# Altium PCB charger.PcbDoc
Units mm, origin at the board's own origin, x right, y up, seen from the top; angles counter-clockwise.
Board outline 30.48 x 35.56 mm, 2 copper layers (Top Layer, Bottom Layer), stack 1.58 mm thick; 22 components, 11 nets, 63 pads, 28 vias.
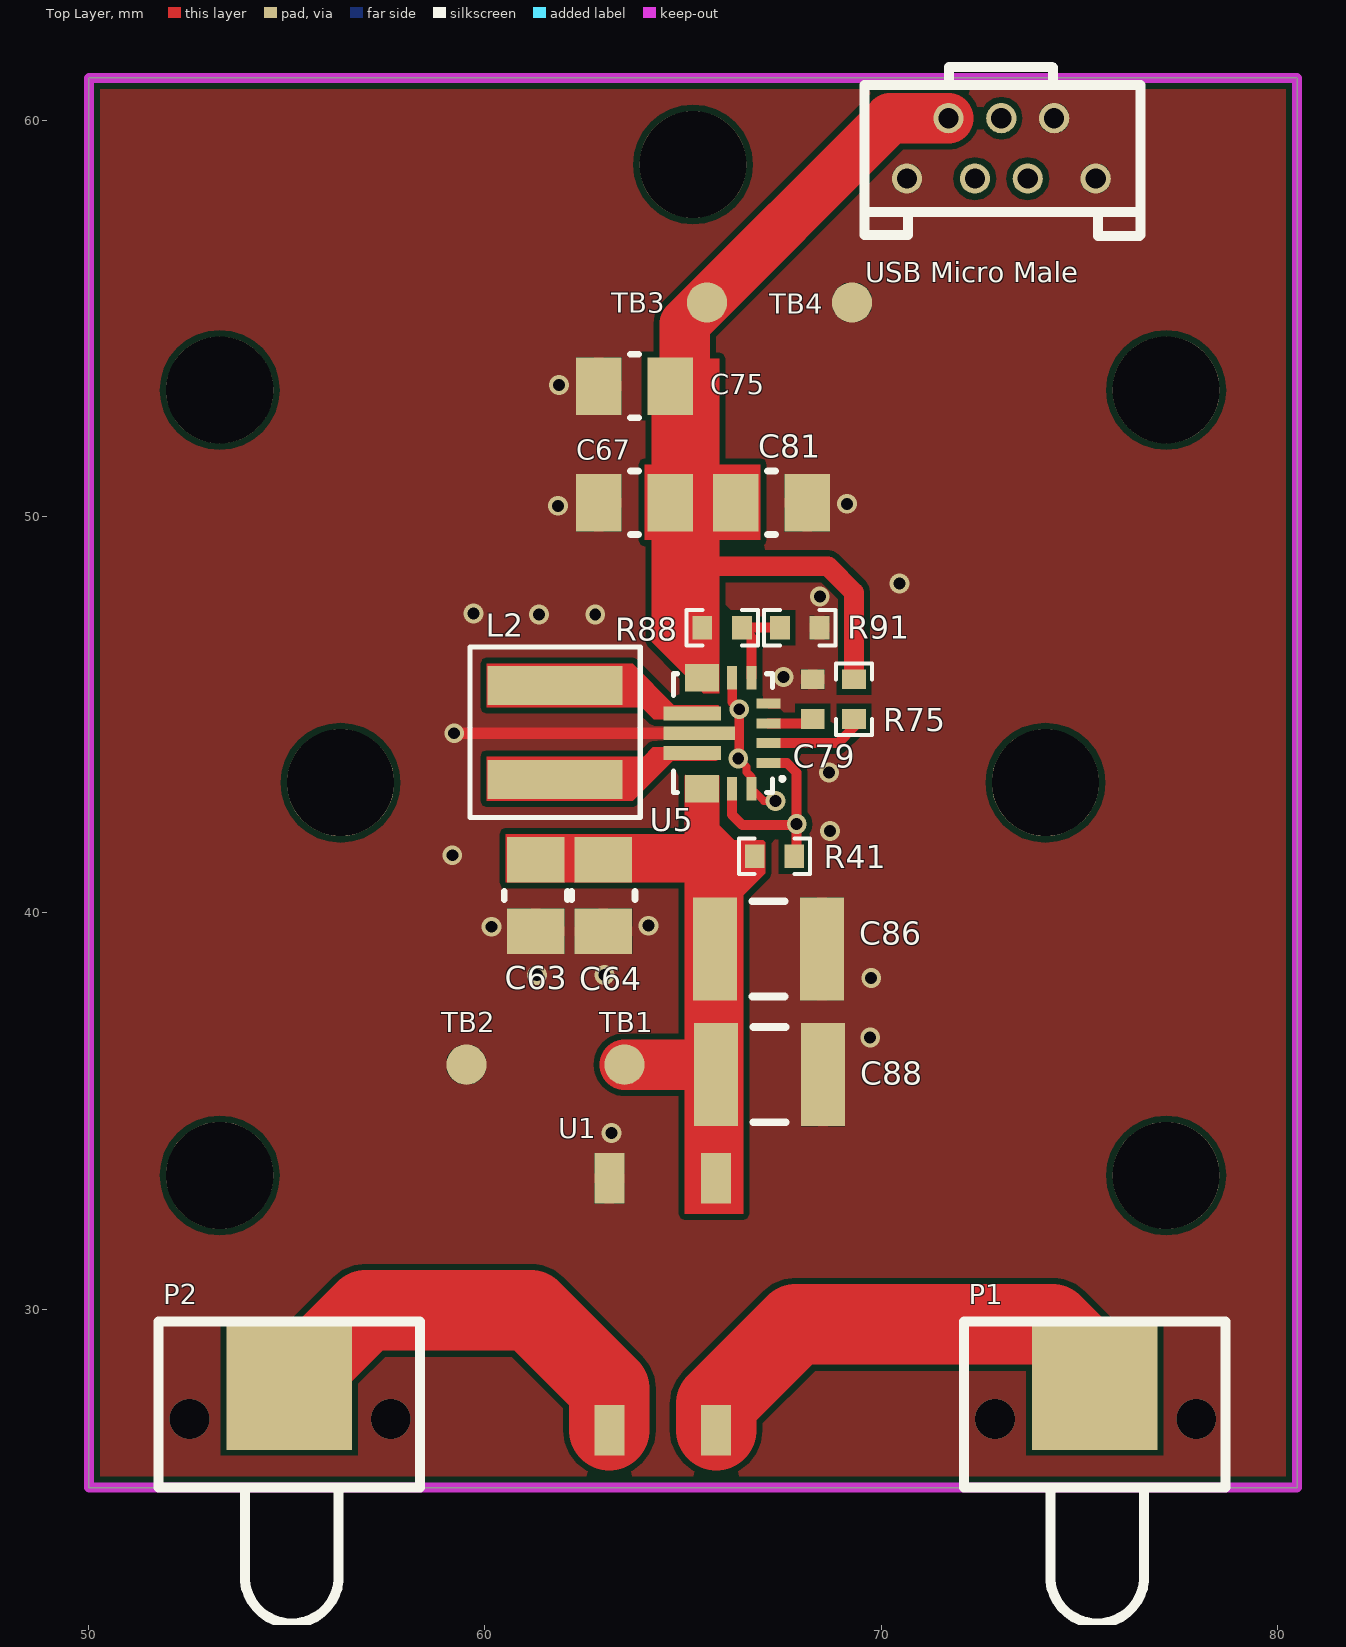
[diagram p0: Top Layer view]
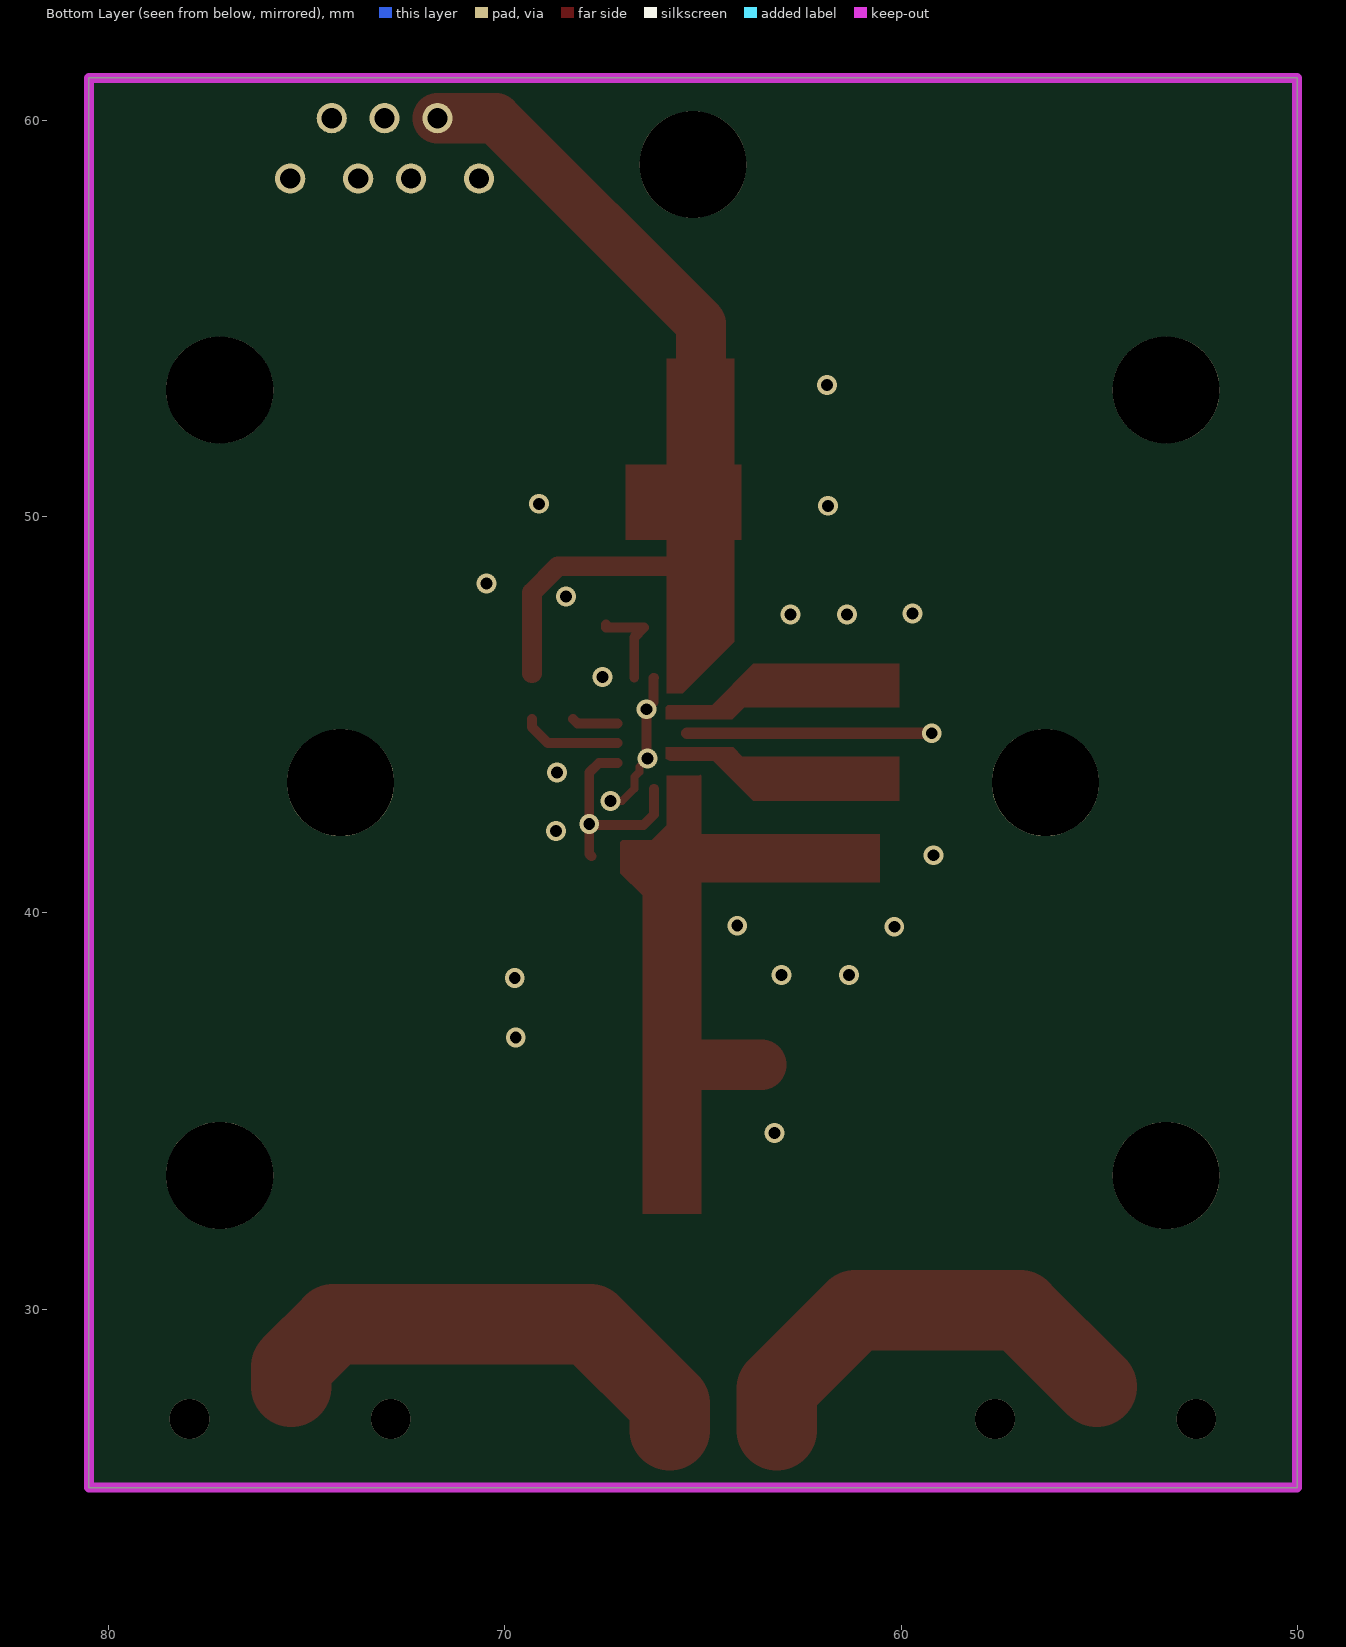
[diagram p1: Bottom Layer view, seen from below]
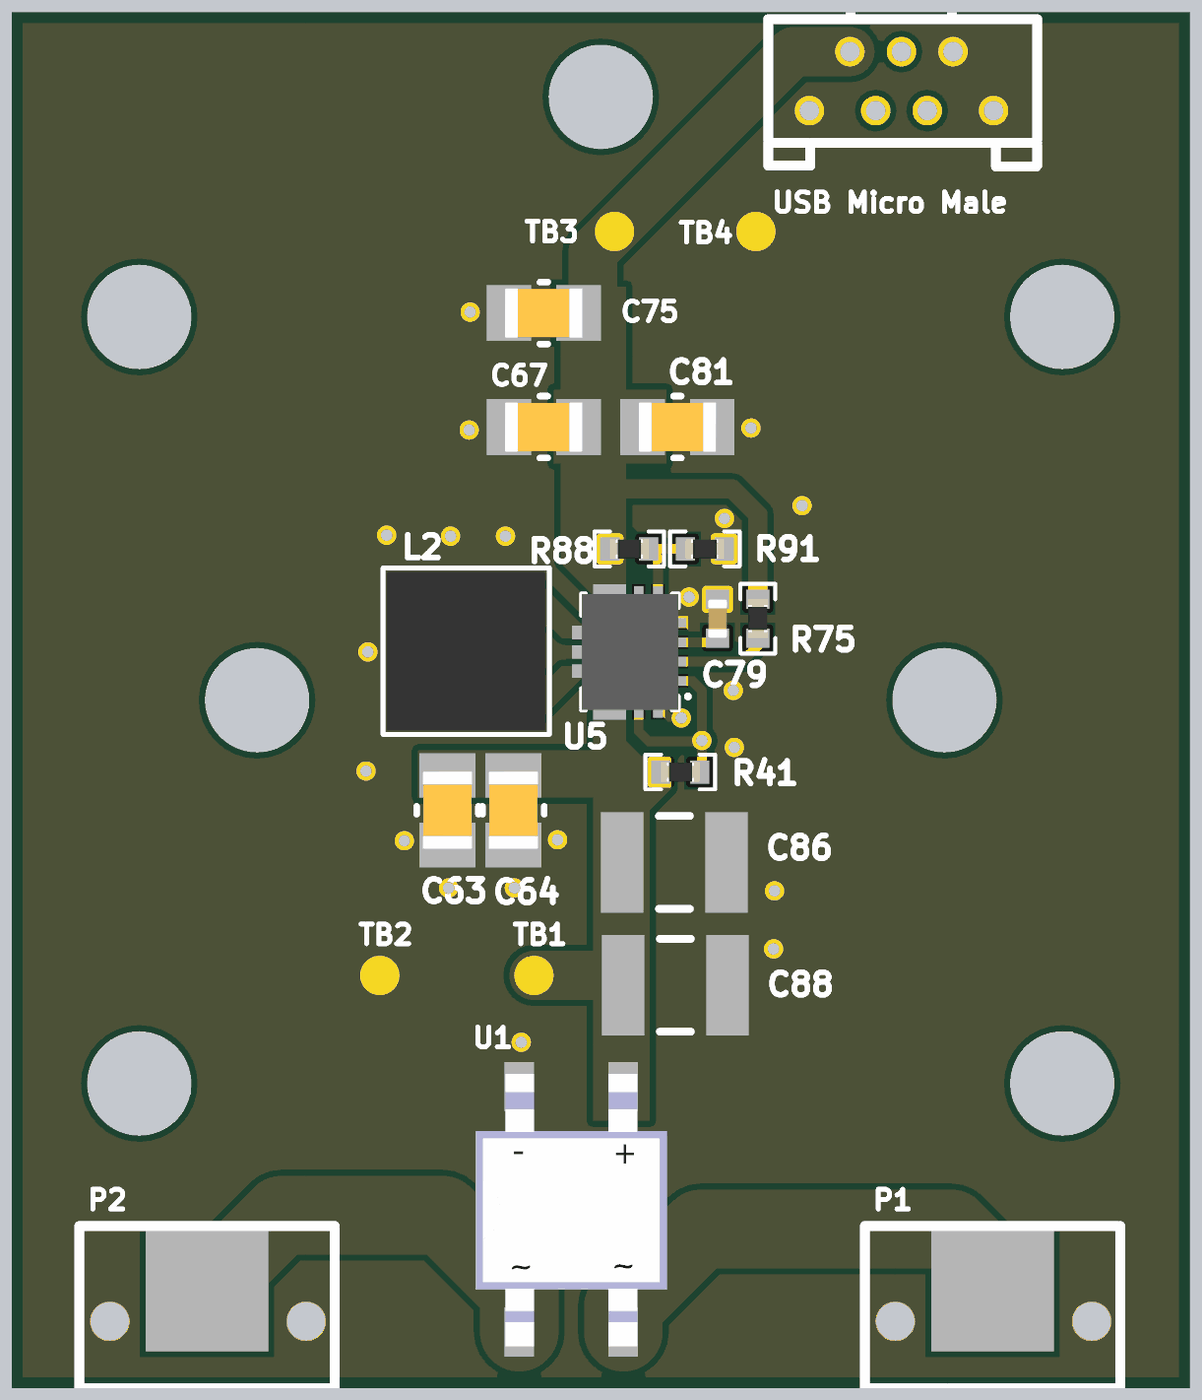
[diagram p2: 3D render of the assembled board from above, using the file's embedded part models]

## Layer stack, top to bottom
Top Solder: solder mask 0.01, Solder Resist, Dk 3.5
Top Layer: signal copper 0.036
Dielectric 1: core 1.508, FR-4, Dk 4.2
Bottom Layer: signal copper 0.036
Bottom Solder: solder mask 0.01, Solder Resist, Dk 3.5

## Board outline
50.013,25.502 50.013,61.062 80.493,61.062 80.493,25.502

## Design rules (kind name [scope] priority, off if disabled: settings)
Clearance Clearance_1 [All] p1: gap=0.152 ignorepadtopadclearanceinfootprint=TRUE
ComponentClearance [All] p1 off: gap=0.254 collisioncheckmode=3 verticalgap=0.254 showdistances=FALSE
HoleSize [All] p1: absolutevalues=TRUE maxlimit=5 minlimit=0.025 maxpercent=80.000 minpercent=20.000
MinimumSolderMaskSliver [All] p1 off: minsoldermaskwidth=0.254
PolygonConnect [isVia and innet(gnd)] p1: connectstyle=Direct reliefconductorwidth=0.254 reliefentries=4 polygonreliefangle="90 Angle" airgapwidth=0.254
RoutingVias [All] p1: holewidth=0.711 width=1.27 viastyle="Through Hole" minholewidth=0.711 minwidth=1.27 maxholewidth=0.711 maxwidth=1.27
SilkToSilkClearance [All] p1 off: silktosilkclearance=0.254
SilkToSolderMaskClearance [IsPad] p1 off: minsilkscreentomaskgap=0.254 clearancetoexposedcopper=TRUE
SolderMaskExpansion [IsVia] p1: expansion=0 soldermaskfromhole=TRUE
Width [All] p1: maxlimit=3 minlimit=0.1 preferedwidth=0.254 minimp=50.000000 maximp=50.000000 favimp=50.000000
25 further rules are at their usual default settings.

## Components (designator, comment, footprint, x,y, rotation, side; value= is the part's Value field where it differs from the comment)
C63 "Cap Semi" C0805 61.29,40.437 r90 top value=22uF
C64 "Cap Semi" C0805 62.992,40.437 r90 top value=22uF
C67 "Cap Semi" C0805 63.779,50.343 r0 top value=22uF
C75 "Cap Semi" C0805 63.779,53.289 r0 top value=22uF
C79 "Cap Semi" C0402 68.275,45.39 r90 top value=0.1uF
C81 "Cap Semi" C0805 67.234,50.343 r180 top value=10uF
C86 "Cap Semi" C1210 67.158,39.091 r180 top value=47uF
C88 "Cap Semi" C1210 67.183,35.916 r180 top value=47uF
L2 "Inductor" INDM4040X210 61.773,44.552 r90 top value=1.5uH
P1 "Plug" Pogo_RightAngle 75.387,28.042 r0 top
P2 "Plug" Pogo_RightAngle 55.067,28.042 r0 top
R41 "Res3" R0402 67.31,41.427 r180 top value=10k
R75 "Res3" R0402 69.317,45.39 r270 top value=100k
R88 "Res3" R0402 65.989,47.193 r180 top value=68k
R91 "Res3" R0402 67.945,47.193 r180 top value=13k
TB1 "TESTPOINT" TP-R40 63.525,36.17 r90 top
TB2 "TESTPOINT" TP-R40 59.538,36.17 r90 top
TB3 "TESTPOINT" TP-R40 65.608,55.397 r90 top
TB4 "TESTPOINT" TP-R40 69.266,55.397 r90 top
U1 "CDBHD2100-G" CDBHD2100-G 65.837,33.299 r270 top
U5 "TPS63070RNMR" QFN50P250X300X100-15N_TPS63070RNMR(Primary) 66.008,44.53 r180 top
"USB Micro Male" "USB MICRO SMD" "MicroUSB B Plug" 70.65,58.522 r0 top (schematic designator USB_SAMD21)

## Footprints (in the part's own frame and the unit in brackets; to place one, negate y for a bottom-side part, rotate by r counter-clockwise, add the part's x,y. Pads: shape width x height; smd on the part's side, far side on the other; paste and mask are expansions set on the pad)
C0402 [mm]
  rect 0.5x0.6 smd mask+0.1: 1(-0.5,0) 2(0.5,0)
  body extent -0.5,-0.25 0.5,0.25, height 0.47
C0805 [mm] "0805 / 1.45mm height"
  rect 1.15x1.45 smd: 1(-0.9,0) 2(0.9,0)
  silkscreen extent -0.1,-0.8 0.1,0.8, body extent -1.09,-0.64 1.09,0.64, height 1.26
C1210 [mm] "Chip Capacitor, Body 3.2x2.5mm, IPC High Density"
  rect 1.1x2.6 smd: 1(-1.35,0) 2(1.35,0)
  silkscreen extent -0.4,-1.2 0.4,1.2, body extent -1.7,-1.35 1.7,1.35, height 1.3
CDBHD2100-G [mil]
  rect 50x30 smd: 1(0,0) 2(0,-106) 3(250,-106) 4(250,0)
  body extent -13,-150 265,44, height 115
INDM4040X210 [mm]
  rect 0.98x3.4 smd: 1(-1.185,0) 2(1.185,0)
  silkscreen extent -2.15,-2.15 2.15,2.15, body extent -2.05,-2.05 2.05,2.05, height 2.1
"MicroUSB B Plug" [mil]
  round 30 hole 20: 1(41.25,60) 2(67.5,0) 3(93.75,60) 4(120,0) 5(146.25,60) 6(0,0) 6(187.5,0)
  silkscreen extent -42,-57 232,111
Pogo_RightAngle [mm]
  rect 3.175x3.175 smd: 1(0,0)
  silkscreen extent -3.3,-5.97 3.3,1.65
QFN50P250X300X100-15N_TPS63070RNMR(Primary) [mm]
  rect 0.6x0.25 smd: 1(-1.15,0.75) 2(-1.15,0.25) 3(-1.15,-0.25) 4(-1.15,-0.75)
  rect 0.25x0.6 smd: 5(-0.725,-1.4) 6(-0.225,-1.4) 14(-0.225,1.4) 15(-0.725,1.4)
  rect 0.85x0.7 smd: 7-8(0.525,-1.4) 12-13(0.525,1.4)
  rect 1.45x0.35 smd: 9(0.775,-0.5) 11(0.775,0.5)
  rect 1.8x0.35 smd: 10(0.6,0)
  silkscreen extent -1.55,-1.5 1.25,1.5, body extent -1.25,-1.5 1.25,1.5, height 1
R0402 [mm]
  rect 0.5x0.6 smd mask+0.1: 1(-0.5,0) 2(0.5,0)
  silkscreen extent -0.9,-0.45 0.9,0.45, body extent -0.5,-0.25 0.5,0.26, height 0.33
TP-R40 [mil]
  round 40 smd paste-40: 1(0,0)
  body extent -20,-20 20,20, height 10

## Part data
C63 C64 C67 C75: "Capacitor (Semiconductor SIM Model)", Capacitance=22uF, Case/Package=0805, Case Code (Metric)=2012, Dielectric=X5R, Manufacturer=Murata, Manufacturer Part Number=GRM21BR61E226ME44K, Max Operating Temperature=85āC, Min Operating Temperature=-55āC, Package Quantity=10000, Supplier Part Number 1=490-14661-1-ND, Tolerance=20%, Voltage Rating=25V, Case Code (Imperial)=0805, Composition=Ceramic, Height=1.25mm, Length=0.079inch, Mount="Surface Mount", Packaging="Tape and Reel", Pricing 1="1=0.49, 10=0.348, 100=0.2291, 500=0.1697, 1000=0.1443, 2500=0.1358, 5000=0.1273 (USD)", Stock 1=36449, Supplier 1=Digi-Key, Termination=SMD/SMT, Thickness=0.057inch, Voltage Rating (DC)=25V, Weight=0.000335oz, Width=1.25mm
C79: "Capacitor (Semiconductor SIM Model)", Capacitance=100nF, Case/Package=0402, Case Code (Metric)=1005, Dielectric=X7R, Manufacturer=Yageo, Manufacturer Part Number=CC0402JRX7R7BB104, Max Operating Temperature=125āC, Min Operating Temperature=-55āC, Package Quantity=10000, Supplier Part Number 1=311-1676-1-ND, Tolerance=5%, Voltage Rating=16V, Case Code (Imperial)=0402, ComponentLink1Description=http://www.mouser.com/ds/2/447/Yageo_UPY-GP_NP0_16V-to-50V_9-358835.pdf, ComponentLink1URL=http://www.mouser.com/ds/2/447/Yageo_UPY-GP_NP0_16V-to-50V_9-358835.pdf, ComponentLink2Description=http://www.yageo.com/documents/recent/UPY-GPHC_X7R_6.3V-to-50V_8.pdf, ComponentLink2URL=http://www.yageo.com/documents/recent/UPY-GPHC_X7R_6.3V-to-50V_8.pdf, Composition=Ceramic, Depth=0.5mm, Halogen Free="Halogen Free", Height=0.5mm, Lead Free="Lead Free", Length=1mm, Mount="Surface Mount", Packaging="Tape and Reel", Pricing 1="1=0.1, 10=0.057, 100=0.0256, 500=0.0183, 1000=0.0144, 2500=0.0131, 5000=0.012 (USD)", Radiation Hardening=No, Stock 1=874792, Supplier 1=Digi-Key, Thickness=0.022inch, Voltage Rating (DC)=16V, Width=0.02inch
C81: "Capacitor", Capacitance=10uF, Case/Package=0805, Case Code (Metric)=2012, Dielectric=X5R, Manufacturer=Samsung, Manufacturer Part Number=CL21A106KOQNNNG, Max Operating Temperature=85āC, Min Operating Temperature=-55āC, Package Quantity=3000, Supplier Part Number 1=1276-6455-1-ND, Tolerance=10%, Voltage=16V, Case Code (Imperial)=0805, ComponentLink1Description=http://www.samsungsem.com/kr/support/product-search/mlcc/CL21A106KOQNNNG.jsp, ComponentLink1URL=http://www.samsungsem.com/kr/support/product-search/mlcc/CL21A106KOQNNNG.jsp, ComponentLink2Description=https://produktinfo.conrad.com/datenblaetter/450000-474999/454932-da-01-en-VS_KONDENSATOR_0805.pdf, ComponentLink2URL=https://produktinfo.conrad.com/datenblaetter/450000-474999/454932-da-01-en-VS_KONDENSATOR_0805.pdf, Depth=1.25mm, Height=1.25mm, Length=2mm, Material=Ceramic, Mount="Surface Mount", Packaging="Tape and Reel", Pricing 1="1=0.14, 10=0.099, 100=0.0463, 500=0.0325, 1000=0.0269 (USD)", Stock 1=30000, Supplier 1=Digi-Key, Thickness=0.053inch, Voltage Rating=16V, Width=0.049inch
C86 C88: "Capacitor (Semiconductor SIM Model)", Capacitance=47uF, Case/Package=1210, Case Code (Metric)=3225, Dielectric=X6S, Manufacturer=Murata, Manufacturer Part Number=GRM32EC81C476KE15L, Max Operating Temperature=105āC, Min Operating Temperature=-55āC, Package Quantity=1000, Supplier Part Number 1=490-10531-1-ND, Tolerance=10%, Voltage=16V, Case Code (Imperial)=1210, ComponentLink1Description=http://www.farnell.com/datasheets/2048597.pdf?src-supplier=Element14, ComponentLink1URL=http://www.farnell.com/datasheets/2048597.pdf?src-supplier=Element14, Depth=2.5mm, Height=2.5mm, Lead Free="Lead Free", Length=3.2mm, Material=Ceramic, Mount="Surface Mount", Packaging="Tape and Reel", Pricing 1="1=0.78, 10=0.571, 100=0.3917, 500=0.3101 (USD)", REACH SVHC="No SVHC", Stock 1=39077, Supplier 1=Digi-Key, Termination=SMD/SMT, Thickness=0.106inch, Voltage Rating=16V, Voltage Rating (DC)=16V, Weight=0.00388oz, Width=2.5mm
L2: Case/Package=SMD/SMT, DC Resistance (DCR)=15.8mR, Inductance=1.5uh, Inductance Tolerance=20%, Manufacturer=Coilcraft, Manufacturer Part Number=XFL4020-152MEC, Max DC Current=9.1A, Max Operating Temperature=125āC, Min Operating Temperature=-40āC, Saturation Current=4.1A, Self Resonant Frequency=59MHz, Supplier Part Number 1=994-XFL4020-152MEC, Test Frequency=100kHz, ComponentLink1Description=http://www.mouser.com/ds/2/597/xfl4020-270756.pdf, ComponentLink1URL=http://www.mouser.com/ds/2/597/xfl4020-270756.pdf, ComponentLink2Description=http://www.farnell.com/datasheets/1682010.pdf, ComponentLink2URL=http://www.farnell.com/datasheets/1682010.pdf, Core Material=Composite, Height=2.1mm, Lead Free="Contains Lead", Length=4.3mm, Mount="Surface Mount", Packaging="Tape and Reel", Pricing 1="1=1.99, 10=1.99, 50=1.99, 100=1.59, 1000=0.885, 10000=0.885 (USD)", REACH SVHC="No SVHC", RMS Current (Irms)=9.1A, Shielding=Shielded, Stock 1=28664, Supplier 1=Mouser, Termination=SMD/SMT, Tolerance=20%, Width=4.3mm
R41: "Resistor", Case/Package=0402, Case Code (Metric)=1005, Manufacturer="TE Connectivity", Manufacturer Part Number=CRG0402J10K/10, Max Operating Temperature=125āC, Min Operating Temperature=-55āC, Number of Resistors=1, Package Quantity=10000, Power Rating=63mW, Resistance=10kR, Supplier Part Number 1=311-10KJRCT-ND, Temperature Coefficient=200ppm/āC, Tolerance=5%, Voltage Rating=50V, Case Code (Imperial)=0402, ComponentLink1Description=http://uk.rs-online.com/webdocs/13e2/0900766b813e23cb.pdf, ComponentLink1URL=http://uk.rs-online.com/webdocs/13e2/0900766b813e23cb.pdf, ComponentLink2Description=http://www.farnell.com/datasheets/1610603.pdf, ComponentLink2URL=http://www.farnell.com/datasheets/1610603.pdf, ComponentLink3Description=http://www.mouser.com/ds/2/418/NG_CD_1622826_BA1-677535.pdf, ComponentLink3URL=http://www.mouser.com/ds/2/418/NG_CD_1622826_BA1-677535.pdf, ComponentLink4Description=http://www.te.com/commerce/DocumentDelivery/DDEController?Action=showdoc&DocId=Data+Sheet%7F1773204%7FF%7Fpdf%7FEnglish%7FENG_DS_1773204_F.pdf, ComponentLink4URL=http://www.te.com/commerce/DocumentDelivery/DDEController?Action=showdoc&DocId=Data+Sheet%7F1773204%7FF%7Fpdf%7FEnglish%7FENG_DS_1773204_F.pdf, Composition="Thick Film", Depth=0.5mm, ELV=Compliant, Height=0.35mm, Length=1mm, Mount="Surface Mount", Number of Terminations=2, Packaging="Tape and Reel", Pricing 2="1=0.1, 10=0.016, 100=0.0064, 1000=0.0029, 2500=0.0025, 5000=0.0021 (USD)", Radiation Hardening=No, REACH SVHC=Unknown, Stock 2=164304, Supplier 1=Digi-Key, Supplier 2=Digi-Key, Supplier Part Number 2=A106045CT-ND, Termination=Solder, Voltage Rating (DC)=50V, Weight=2.3E-05oz, Width=0.5mm
R75: "Resistor", Case/Package=0402, Case Code (Metric)=1005, Manufacturer=Yageo, Manufacturer Part Number=RC0402FR-07100KL, Max Operating Temperature=155āC, Max Power Dissipation=63mW, Min Operating Temperature=-55āC, Package Quantity=1, Resistance=100kR, Supplier Part Number 1=311-100KLRCT-ND, Temperature Coefficient=100ppm/āC, Tolerance=1%, Voltage Rating=50V, Case Code (Imperial)=0402, ComponentLink1Description=http://www.yageo.com/documents/recent/PYu-RC_Group_51_RoHS_L_10.pdf?src-supplier=Digi-Key, ComponentLink1URL=http://www.yageo.com/documents/recent/PYu-RC_Group_51_RoHS_L_10.pdf?src-supplier=Digi-Key, ComponentLink2Description=http://www.farnell.com/datasheets/1018594.pdf?src-supplier=Element14, ComponentLink2URL=http://www.farnell.com/datasheets/1018594.pdf?src-supplier=Element14, ComponentLink3Description=http://www.yageo.com/documents/recent/PYu-RC_Group_51_RoHS_L_9.pdf?src-supplier=Verical, ComponentLink3URL=http://www.yageo.com/documents/recent/PYu-RC_Group_51_RoHS_L_9.pdf?src-supplier=Verical, ComponentLink4Description=http://www.yageo.com/documents/recent/PYu-RC_Group_51_RoHS_L_9.pdf?src-supplier=Mouser, ComponentLink4URL=http://www.yageo.com/documents/recent/PYu-RC_Group_51_RoHS_L_9.pdf?src-supplier=Mouser, ComponentLink5Description=http://documents.rs-components.com/techlib://itc_doclist_GB.htm?stockno=6185797&src-supplier=RSComponents, ComponentLink5URL=http://documents.rs-components.com/techlib://itc_doclist_GB.htm?stockno=6185797&src-supplier=RSComponents, Composition="Thick Film", Depth=0.5mm, Features="Moisture Resistant", Height=0.016inch, Lead Free="Lead Free", Length=0.039inch, Military Standard=Not, Number of Terminations=2, Packaging="Tape and Reel", Power Rating=63mW, Pricing 1="1=0.1, 10=0.016, 100=0.0067, 1000=0.003, 2500=0.0026, 5000=0.0022 (USD)", REACH SVHC="No SVHC", Stock 1=62177550, Supplier 1=Digi-Key, Termination=SMD/SMT, Width=0.02inch, Working Voltage=50V
R88: "Resistor", Case/Package=0402, Case Code (Metric)=1005, Manufacturer=Yageo, Manufacturer Part Number=RC0402JR-0768KL, Max Operating Temperature=155āC, Max Power Dissipation=63mW, Min Operating Temperature=-55āC, Package Quantity=1, Resistance=68kR, Supplier Part Number 1=311-68KJRCT-ND, Temperature Coefficient=100ppm/āC, Tolerance=5%, Voltage Rating=50V, Case Code (Imperial)=0402, ComponentLink1Description=http://www.yageo.com/documents/recent/PYu-RC_Group_51_RoHS_L_9.pdf, ComponentLink1URL=http://www.yageo.com/documents/recent/PYu-RC_Group_51_RoHS_L_9.pdf, ComponentLink2Description=http://www.yageo.com/documents/recent/PYu-RC_Group_51_RoHS_L_10.pdf, ComponentLink2URL=http://www.yageo.com/documents/recent/PYu-RC_Group_51_RoHS_L_10.pdf, ComponentLink3Description=http://www.farnell.com/datasheets/1018594.pdf, ComponentLink3URL=http://www.farnell.com/datasheets/1018594.pdf, Composition="Thick Film", Depth=0.5mm, Features="Moisture Resistant", Height=0.016inch, Lead Free="Lead Free", Length=1mm, Military Standard=Not, Number of Pins=2, Number of Terminations=2, Packaging="Tape and Reel", Power Rating=63mW, Pricing 1="1=0.1, 10=0.013, 100=0.0055, 1000=0.0025, 2500=0.0021, 5000=0.0018 (USD)", REACH SVHC="No SVHC", Stock 1=2047315, Supplier 1=Digi-Key, Termination=SMD/SMT, Voltage Rating (DC)=50V, Width=0.02inch, Working Voltage=50V
R91: "Resistor", Case/Package=0402, Case Code (Metric)=1005, Manufacturer=Yageo, Manufacturer Part Number=RC0402FR-0713KL, Max Operating Temperature=155āC, Max Power Dissipation=63mW, Min Operating Temperature=-55āC, Package Quantity=10000, Power Rating=62.5mW, Resistance=13kR, Supplier Part Number 1=311-13.0KLRCT-ND, Temperature Coefficient=100ppm/āC, Tolerance=1%, Voltage Rating=50V, Case Code (Imperial)=0402, ComponentLink1Description=http://www.yageo.com/documents/recent/PYu-RC_Group_51_RoHS_L_9.pdf, ComponentLink1URL=http://www.yageo.com/documents/recent/PYu-RC_Group_51_RoHS_L_9.pdf, ComponentLink2Description=http://www.yageo.com/documents/recent/PYu-RC_Group_51_RoHS_L_10.pdf, ComponentLink2URL=http://www.yageo.com/documents/recent/PYu-RC_Group_51_RoHS_L_10.pdf, ComponentLink3Description=http://documents.rs-components.com/techlib://itc_doclist_GB.htm?stockno=6185961, ComponentLink3URL=http://documents.rs-components.com/techlib://itc_doclist_GB.htm?stockno=6185961, ComponentLink4Description=http://www.mouser.com/ds/2/447/PYu-RC0402_51_RoHS_L_6_r-8721.pdf, ComponentLink4URL=http://www.mouser.com/ds/2/447/PYu-RC0402_51_RoHS_L_6_r-8721.pdf, Composition="Thick Film", Depth=0.5mm, Features="Moisture Resistant", Height=0.016inch, Lead Free="Lead Free", Length=1mm, Military Standard=Not, Mount="Surface Mount", Number of Terminations=2, Packaging="Tape and Reel", Pricing 1="1=0.1, 10=0.016, 100=0.0067, 1000=0.003, 2500=0.0026, 5000=0.0022 (USD)", Stock 1=1193115, Supplier 1=Digi-Key, Termination=SMD/SMT, Voltage Rating (DC)=50V, Width=0.02inch, Working Voltage=50V
TB1 TB2 TB3 TB4: "SMD test pin"
U1: library part DIODE_BRIDGE_100V_2A, "BRIDGE RECT 1P 100V 2A MINI-DIP", Manufacturer=Comchip, Max Reverse Leakage Current=500uA, Max Surge Current=50A, Package Quantity=2500, Supplier Part Number 1=641-1212-1-ND, ComponentLink1Description=http://media.digikey.com/PDF/Data%20Sheets/Comchip%20PDFs/CDBHD280-G%20thru%202100-G.PDF?src-supplier=Digi-Key, ComponentLink1URL=http://media.digikey.com/PDF/Data%20Sheets/Comchip%20PDFs/CDBHD280-G%20thru%202100-G.PDF?src-supplier=Digi-Key, ComponentLink2Description=http://www.comchiptech.com/admin/files/product/CDBHD240-G%20Thru.%20CDBHD2100-G%20%20%20%20%20RevC.PDF?src-supplier=Digi-Key, ComponentLink2URL=http://www.comchiptech.com/admin/files/product/CDBHD240-G%20Thru.%20CDBHD2100-G%20%20%20%20%20RevC.PDF?src-supplier=Digi-Key, ComponentLink3Description=http://www.mouser.com/ds/2/80/CDBHD240-G%20Thru.%20CDBHD2100-G%20%20%20%20%20RevC-766412.pdf?src-supplier=Mouser, ComponentLink3URL=http://www.mouser.com/ds/2/80/CDBHD240-G%20Thru.%20CDBHD2100-G%20%20%20%20%20RevC-766412.pdf?src-supplier=Mouser, Manufacturer Part Number=CDBHD2100-G, Mount="Surface Mount", Packaging="Tape and Reel", Pricing 1="1=1.26, 10=1.125, 25=1.068, 100=0.8772, 250=0.82, 500=0.7246, 1000=0.5721 (USD)", Stock 1=28798, Supplier 1=Digi-Key
U5: "Wide Input Voltage _2V-16V_ Buck-Boost Converter 15-VQFN-HR", Case/Package=VQFN, Manufacturer="Texas Instruments", Max Input Voltage=16V, Max Operating Temperature=125āC, Max Output Voltage=9V, Min Input Voltage=2V, Min Operating Temperature=-40āC, Min Output Voltage=2.5V, Output Current=2A, Package="VQFN-15 Texas Instruments", Quiescent Current=50uA, Supplier Part Number 1=296-44874-1-ND, Switching Frequency=2.4MHz, Digi-Key_Part_Number=296-44874-1-ND, Digi-Key_Purchase_URL=https://www.digikey.com/product-detail/en/texas-instruments/TPS63070RNMR/296-44874-1-ND/6217416?utm_source=snapeda&utm_medium=aggregator&utm_campaign=symbol, Lead Free="Lead Free", Manufacturer Part Number=TPS63070RNMR, MF="Texas Instruments", Mount="Surface Mount", MP=TPS63070RNMR, Number of Outputs=1, Number of Pins=15, Output Configuration=Positive, Output Type=Adjustable, Packaging="Tape and Reel", Pricing 1="1=2.67, 10=2.402, 100=1.9306, 500=1.5862, 1000=1.3143 (USD)", SnapEDA_Link=https://www.snapeda.com/parts/TPS63070RNMR/Texas%20Instruments/view-part/?ref=snap, Stock 1=31678, Supplier 1=Digi-Key, Synchronous Rectifier=Yes, Topology=Buck-Boost
"USB Micro Male": "CONN RCPT USB MICRO AB SMD R/A"
P1 P2: LatestRevisionDate=17-Jul-2002, LatestRevisionNote="Re-released for DXP Platform.", Publisher="Altium Limited"

## Free pads (board coordinates)
  round 2.7 hole 2.7 unplated: 1(53.315,33.376) 1(53.315,53.188) 1(56.363,43.282) 1(65.253,58.877) 1(74.143,43.282) 1(77.191,33.376) 1(77.191,53.188)

## Via types
v1: diameter 0.5, hole 0.3, Top Layer to Bottom Layer, 24 vias
v2: diameter 1, hole 1, Top Layer to Bottom Layer, 4 vias

## Nets (pads, with @x,y where several pads share a name; then routed paths per layer and width w, separated by ;. In a path a pad name is that pad's centre, name@x,y a point inside that pad or via, vN(x,y) a via of type N, cw(c..) or ccw(c..) an arc to the next point about the centre after c; other vN are vias at no path point)
EN5V: R41.1 U5.1 U5.14 | length 5.3
  Top Layer w0.25: U5.14 66.233,42.479 66.497,42.215 v1@67.869,42.215 ; U5.1 67.624,43.78 67.869,43.536 v1(67.869,42.24) v1@67.869,42.215 ; R41.1 67.869,41.486 v1@67.869,42.215
FB: R88.1 R91.2 U5.5 | length 2.4
  Top Layer w0.25: U5.5 66.733,46.95 R88.1 R91.2 R91.2@67.445,47.277
GND: "USB Micro Male.5" "USB Micro Male.6" C63.1 C64.1 C67.1 C75.1 C79.2 C81.1 C86.1 C88.1 R91.1 TB2.1 TB4.1 U1.2 U5.4 U5.6 U5.10 U5.15 | length 9.9
  Top Layer w0.2: v1(66.396,43.891) 66.605,43.682 66.605,43.551 66.733,43.423 U5.15 67.038,42.824 v1(67.335,42.824)
  Top Layer w0.25: U5.6 66.243,45.92 66.243,45.314 v1(66.421,45.136) 66.421,43.917 v1(66.396,43.891)
  Top Layer w0.3: v1(59.229,44.53) U5.10
  other v1: 63.195,34.442 69.723,36.855 69.748,38.354 61.316,38.43 63.017,38.43 60.173,39.649 64.135,39.675 59.182,41.453 68.707,42.062 68.682,43.536 67.539,45.949 61.366,47.523 62.789,47.523 59.715,47.549 68.453,47.981 70.46,48.311 61.849,50.267 69.139,50.317 61.874,53.315
  other v2: 52.553,27.229 57.633,27.229 72.873,27.229 77.953,27.229
NetC79_1: C79.1 U5.3 | length 1.2
  Top Layer w0.25: U5.3 68.166,44.78 C79.1
NetL2_1: L2.1 U5.11
NetL2_2: L2.2 U5.9
NetP1_1: P1.1 U1.4 | length 12
  Top Layer w2.032: U1.4 65.837,27.61 67.843,29.616 74.32,29.616 75.387,28.55 P1.1
NetP2_1: P2.1 U1.3 | length 10.7
  Top Layer w2.032: P2.1 56.998,29.972 61.163,29.972 63.144,27.991 U1.3
NetR75_2: R75.2 U5.2 | length 2.5
  Top Layer w0.254: U5.2 68.91,44.28 69.317,44.687 R75.2
VCC12V: C63.2 C64.2 C86.2 C88.2 R41.2 TB1.1 U1.1 U5.12-13 | length 2.4
  Top Layer w1.27: TB1.1 65.579,36.17 C88.2
VDD5V: "USB Micro Male.1" C67.2 C75.2 C81.2 R75.1 R88.2 TB3.1 U5.7-8 | length 17.5
  Top Layer w0.5: 65.684,48.743 68.656,48.743 69.317,48.082 R75.1@69.317,46.042
  Top Layer w1.27: 65.049,52.095 65.049,54.864 70.231,60.046 71.698,60.046
pads on no net: "USB Micro Male.2" "USB Micro Male.3" "USB Micro Male.4"

## Polygon pours and split planes (outlines as drawn)
GND on Top Layer "Top Layer-No Net" (solid, remove dead copper, pour order 0): 50.013,25.502 50.013,61.062 80.493,61.062 80.493,25.502

## Keep-outs
Keep-Out Layer:
  the board outline again, w0.254

## Other copper
Top Layer:
  rectangle net VDD5V: 64.033,49.403 66.954,51.308
  region net VCC12V: 65.913,41.986 60.528,41.986 60.528,40.767 65.913,40.767
  region net VDD5V: 65.913,50.292 64.287,50.292 64.287,49.073 65.913,49.073
  region net VCC12V: 65.075,43.485 65.1,43.459 65.913,43.459 65.913,42.215 66.294,41.834 67.031,41.834 67.081,41.783 67.081,40.996 66.523,40.437 66.523,32.41 65.049,32.41 65.049,43.459
  region net NetL2_1: 65.837,43.84 64.745,43.84 63.729,42.824 60.046,42.824 60.046,43.942 64.008,43.942 64.237,44.171 65.938,44.171 65.938,43.891
  region net NetL2_2: 64.262,44.882 63.957,45.187 60.046,45.187 60.046,46.279 63.729,46.279 64.77,45.237 65.888,45.237 65.938,45.187 65.938,44.882
  region net VDD5V: 64.211,46.838 64.211,53.975 65.913,53.975 65.913,45.542 65.507,45.542

## Silkscreen, mask and mechanical layers (free items; w line width, h text height)
Mechanical 2:
  drawing of 191 lines, arcs and shapes, not listed
  text "Layer" at 97.576,47.65 h1.52
  text "Name" at 107.988,47.65 h1.52
  text "Material" at 131.603,47.65 h1.52
  text "Thickness" at 153.441,47.65 h1.52
  text "Constant" at 169.947,47.65 h1.52
  text "Board Layer Stack" at 184.422,47.65 h1.52
  text "1" at 97.576,44.602 h1.52
  text "Top Overlay" at 107.988,44.602 h1.52
  text "2" at 97.576,41.554 h1.52
  text "Top Solder" at 107.988,41.554 h1.52
  text "Solder Resist" at 131.603,41.554 h1.52
  text "0.010mm" at 153.441,41.554 h1.52
  text "3.5" at 169.947,41.554 h1.52
  text "3" at 97.576,38.506 h1.52
  text "Top Layer" at 107.988,38.506 h1.52
  text "Copper" at 131.603,38.506 h1.52
  text "0.036mm" at 153.441,38.506 h1.52
  text "4" at 97.576,35.458 h1.52
  text "Dielectric 1" at 107.988,35.458 h1.52
  text "FR-4" at 131.603,35.458 h1.52
  text "1.508mm" at 153.441,35.458 h1.52
  text "4.2" at 169.947,35.458 h1.52
  text "5" at 97.576,32.41 h1.52
  text "Bottom Layer" at 107.988,32.41 h1.52
  text "Copper" at 131.603,32.41 h1.52
  text "0.036mm" at 153.441,32.41 h1.52
  text "6" at 97.576,29.362 h1.52
  text "Bottom Solder" at 107.988,29.362 h1.52
  text "Solder Resist" at 131.603,29.362 h1.52
  text "0.010mm" at 153.441,29.362 h1.52
  text "3.5" at 169.947,29.362 h1.52
  text "7" at 97.576,26.314 h1.52
  text "Bottom Overlay" at 107.988,26.314 h1.52
Drill Drawing:
  circle w0.254: c98.418,66.556 r0.847
  lines w0.254: 97.571,58.09 99.265,58.09 99.265,59.783 97.571,59.783 97.571,58.09 ; 97.571,63.593 99.265,63.593 98.418,61.9 97.571,63.593 ; 97.571,69.52 99.265,69.52 99.265,71.213 97.571,71.213 97.571,69.52 ; 97.91,58.428 98.926,58.428 98.926,59.444 97.91,59.444 97.91,58.428
  lines w0.381: 96.053,56.947 274.109,56.947 ; 96.053,72.187 274.109,72.187 ; 110.045,53.137 110.045,75.997 ; 123.757,53.137 123.757,75.997 ; 152.959,53.137 152.959,75.997 ; 165.808,53.137 165.808,75.997 ; 184.447,53.137 184.447,75.997 ; 222.535,53.137 222.535,75.997 ; 237.517,53.137 237.517,75.997 ; 256.461,53.137 256.461,75.997 ; 96.053,53.137 274.109,53.137 274.109,75.997 96.053,75.997 96.053,53.137
  text "Symbol" at 98.339,73.33 h1.83
  text "Count" at 111.188,73.33 h1.83
  text "Hole Size" at 124.9,73.33 h1.83
  text "Plated" at 154.102,73.33 h1.83
  text "Hole Type" at 166.951,73.33 h1.83
  text "Drill Layer Pair" at 185.59,73.33 h1.83
  text "Via/Pad" at 223.678,73.33 h1.83
  text "Pad Shape" at 238.66,73.33 h1.83
  text "Template" at 257.604,73.33 h1.83
  text "4" at 111.188,69.52 h1.52
  text "1.000mm (39.37mil)" at 124.9,69.52 h1.52
  text "PTH" at 154.102,69.52 h1.52
  text "Round" at 166.951,69.52 h1.52
  text "Top Layer - Bottom Layer" at 185.59,69.52 h1.52
  text "Via" at 223.678,69.52 h1.52
  text "Rounded" at 238.66,69.52 h1.52
  text "(Mixed)" at 257.604,69.52 h1.52
  text "7" at 111.188,65.71 h1.52
  text "0.508mm (20.00mil)" at 124.9,65.71 h1.52
  text "PTH" at 154.102,65.71 h1.52
  text "Round" at 166.951,65.71 h1.52
  text "Top Layer - Bottom Layer" at 185.59,65.71 h1.52
  text "Pad" at 223.678,65.71 h1.52
  text "Rounded" at 238.66,65.71 h1.52
  text "c76h51" at 257.604,65.71 h1.52
  text "7" at 111.188,61.9 h1.52
  text "2.700mm (106.30mil)" at 124.9,61.9 h1.52
  text "NPTH" at 154.102,61.9 h1.52
  text "Round" at 166.951,61.9 h1.52
  text "Top Layer - Bottom Layer" at 185.59,61.9 h1.52
  text "Pad" at 223.678,61.9 h1.52
  text "Rounded" at 238.66,61.9 h1.52
  text "c270hn270" at 257.604,61.9 h1.52
  text "24" at 111.188,58.09 h1.52
  text "0.300mm (11.81mil)" at 124.9,58.09 h1.52
  text "PTH" at 154.102,58.09 h1.52
  text "Round" at 166.951,58.09 h1.52
  text "Top Layer - Bottom Layer" at 185.59,58.09 h1.52
  text "Via" at 223.678,58.09 h1.52
  text "Rounded" at 238.66,58.09 h1.52
  text "v50h30" at 257.604,58.09 h1.52
  text "42 Total" at 111.188,54.28 h1.52

## Dimensions
56.363,43.282 to 50.013,61.062 on Mechanical 3
65.253,58.877 to 50.013,61.062 on Mechanical 3
74.143,43.282 to 80.493,25.502 on Mechanical 3
56.363,43.282 to 50.013,25.502 on Mechanical 3
53.315,53.188 to 50.013,61.062 on Mechanical 3
50.013,25.502 to 53.315,33.376 on Mechanical 3
50.013,61.062 to 53.315,53.188 on Mechanical 3
75.413,58.522 to 80.493,61.062 on Mechanical 3
80.493,61.062 to 75.413,58.522 on Mechanical 3
50.013,61.062 to 80.493,61.062 on Mechanical 3
80.493,61.062 to 80.493,25.502 on Mechanical 3
52.553,27.229 to 50.013,25.502 on Mechanical 3
77.953,27.229 to 80.493,25.502 on Mechanical 3